# Altium PCB TL203蓝牙主板20529.PcbDoc (part 1 of 3)
Units mil, origin at the board's own origin, x right, y up, seen from the top; angles counter-clockwise.
Board outline 2775 x 2250 mil, 2 copper layers (Top Layer, Bottom Layer); 102 components, 86 nets, 328 pads, 438 vias.
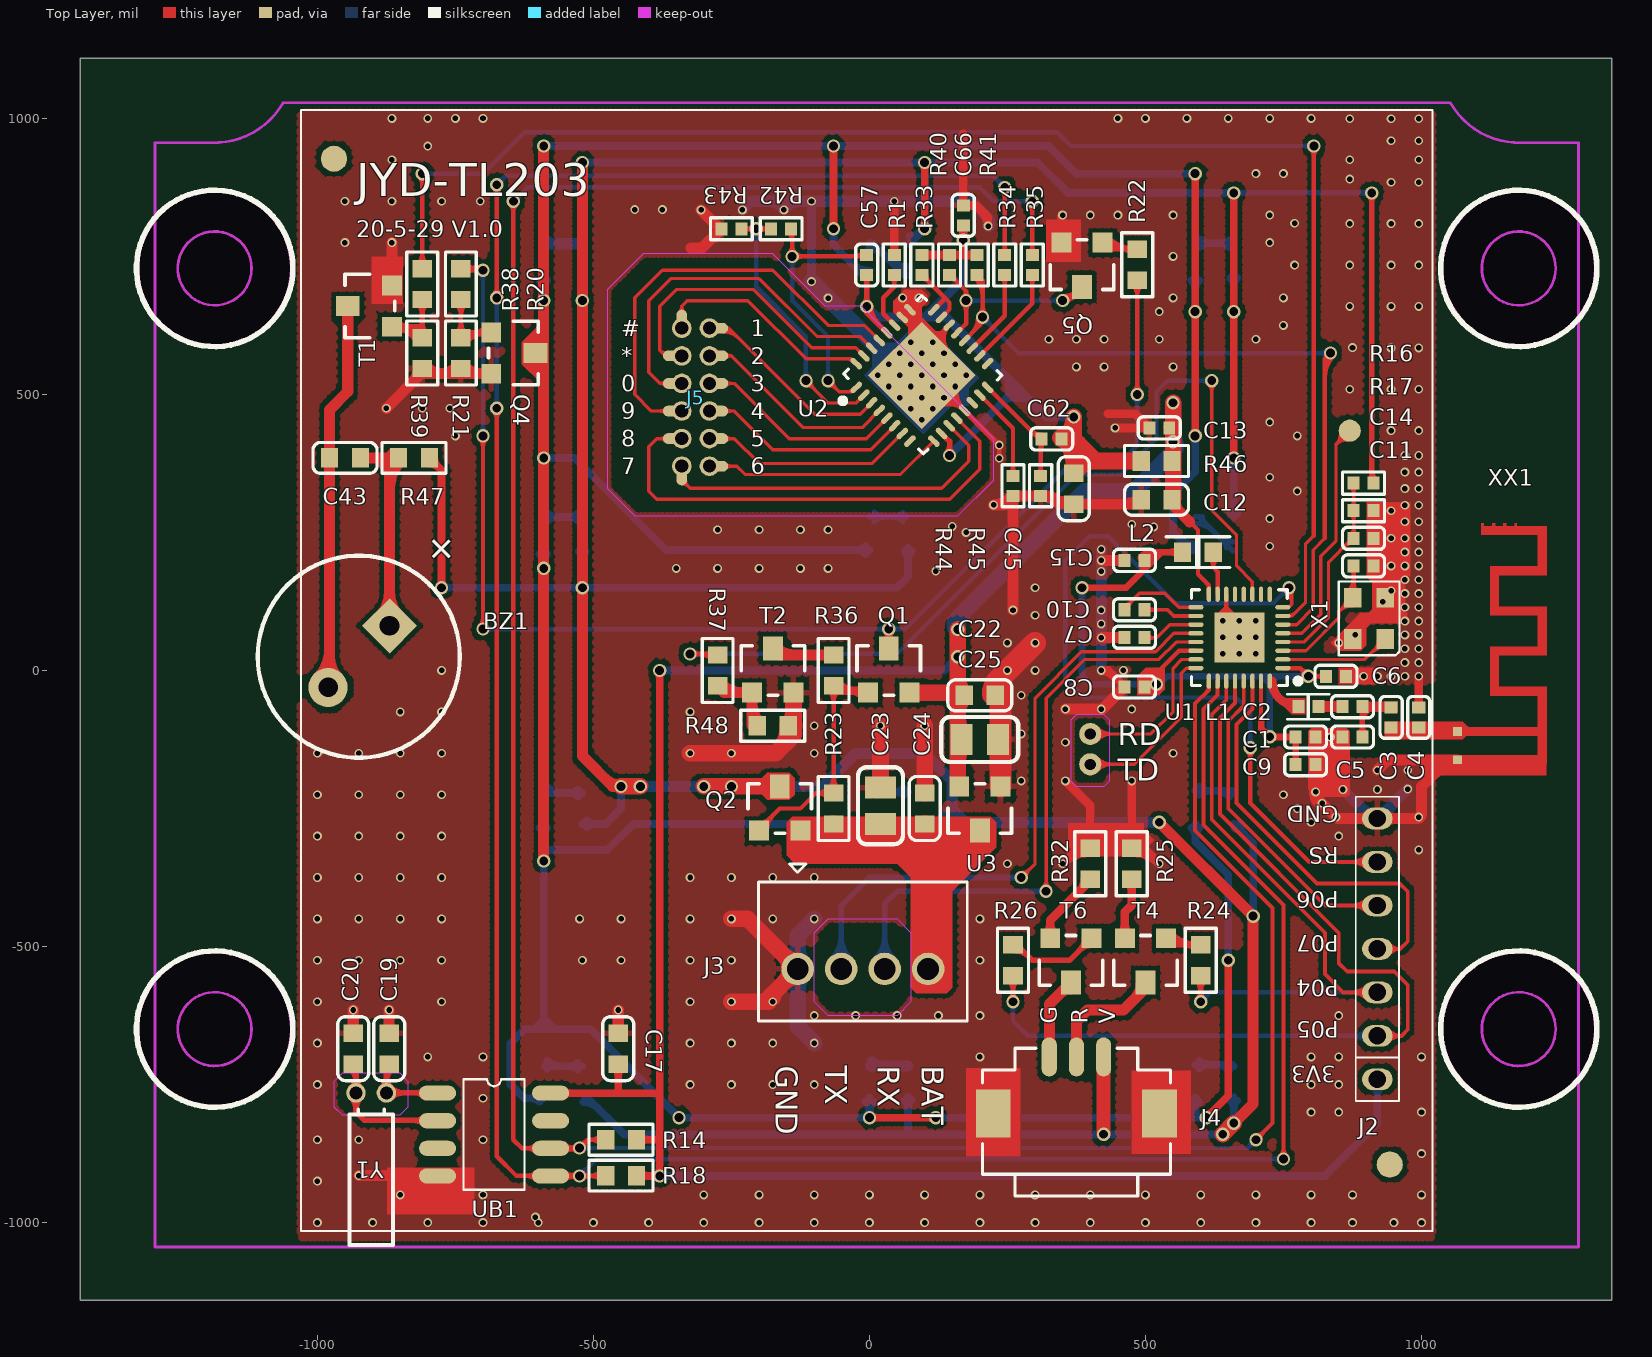
[diagram p0: Top Layer view]
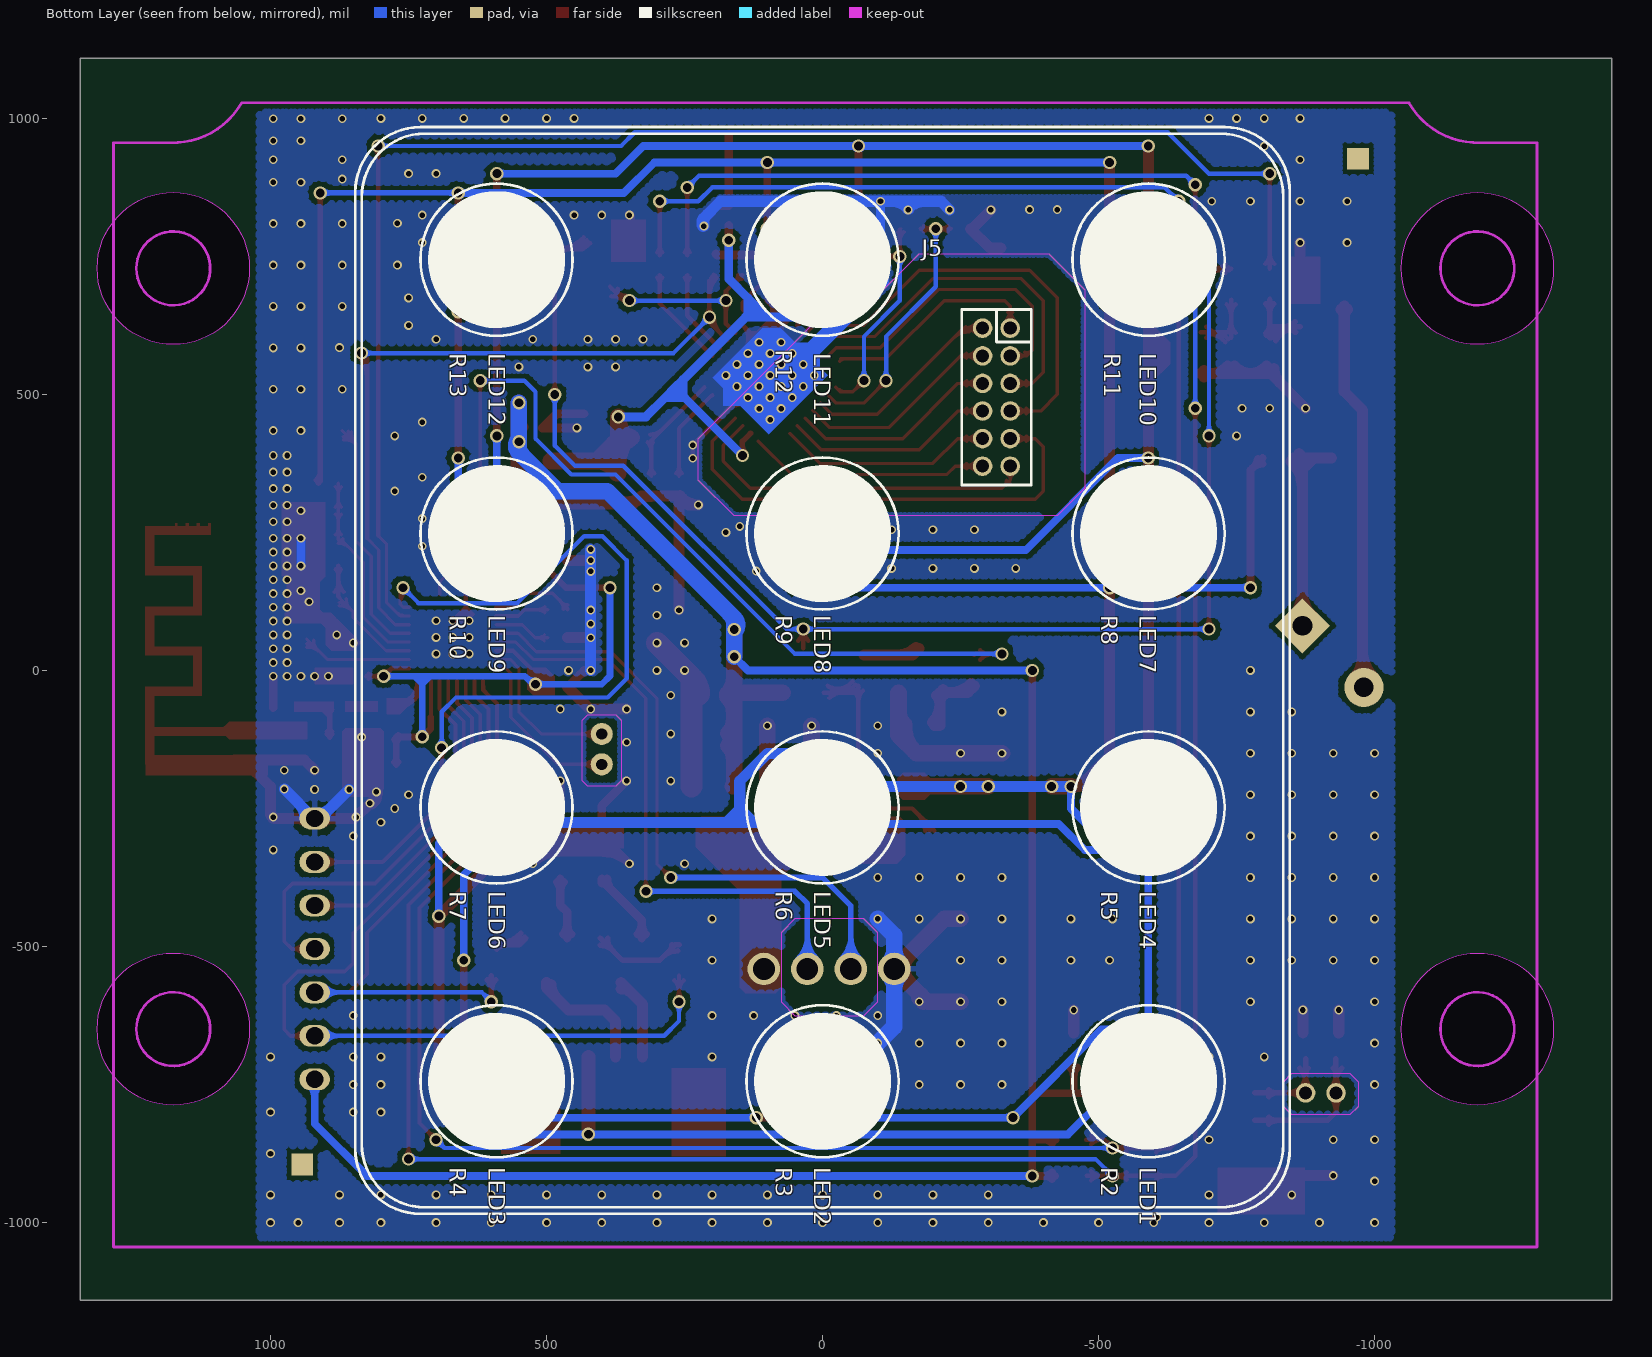
[diagram p1: Bottom Layer view, seen from below]
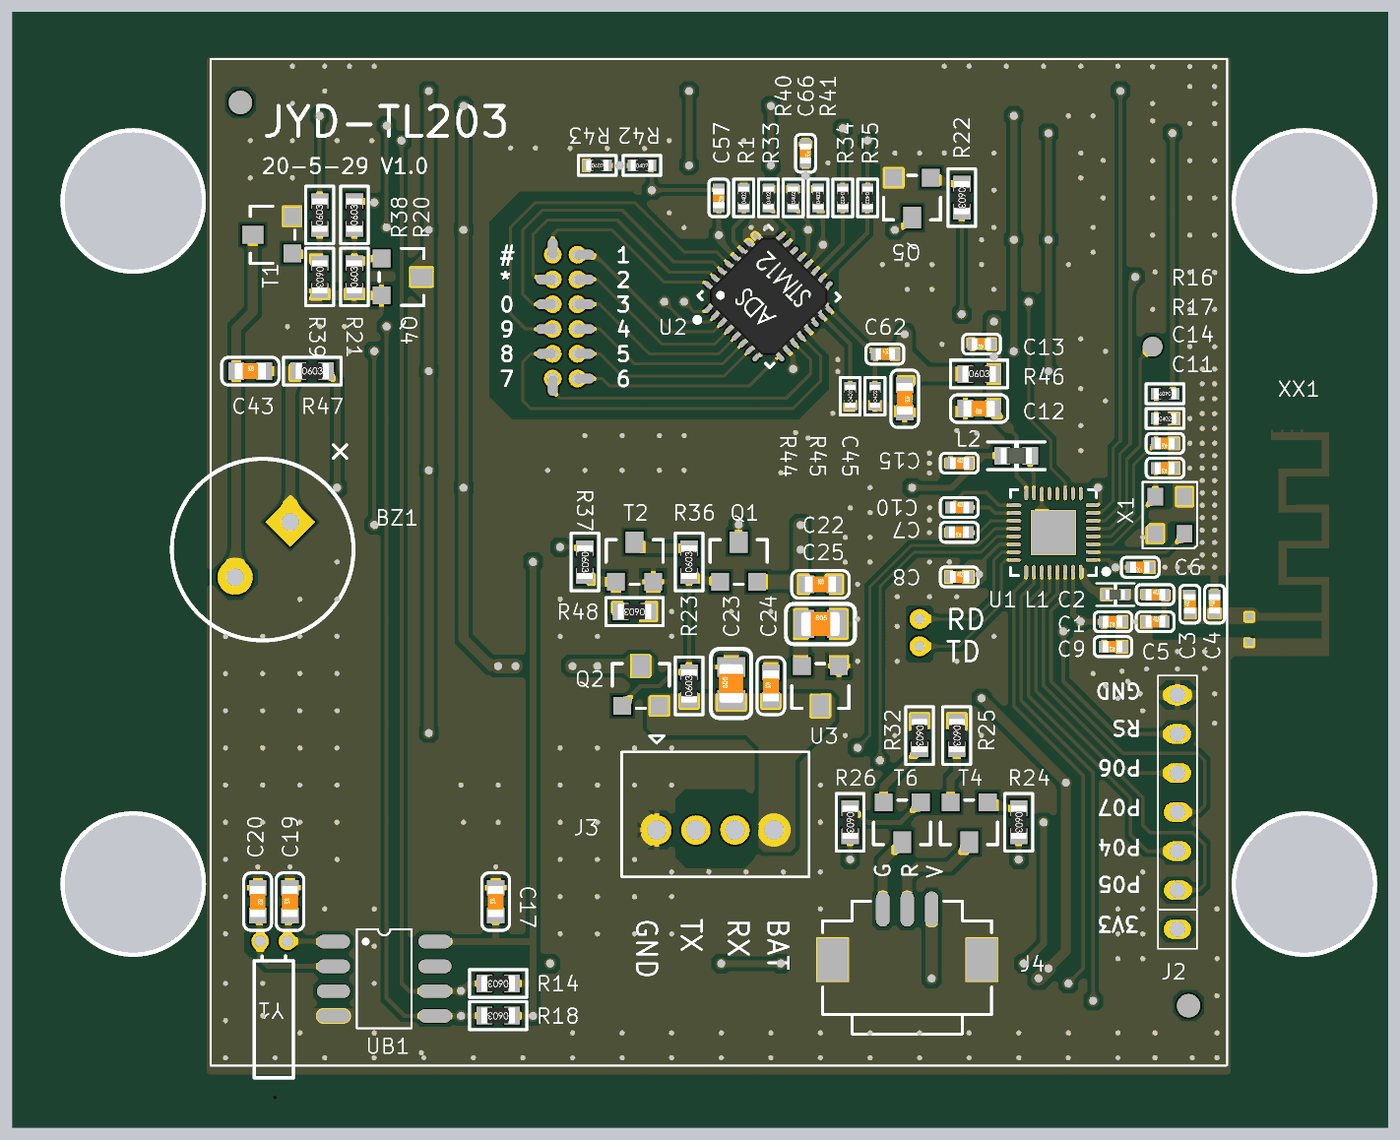
[diagram p4: 3D render of the assembled board from above, using the file's embedded part models]
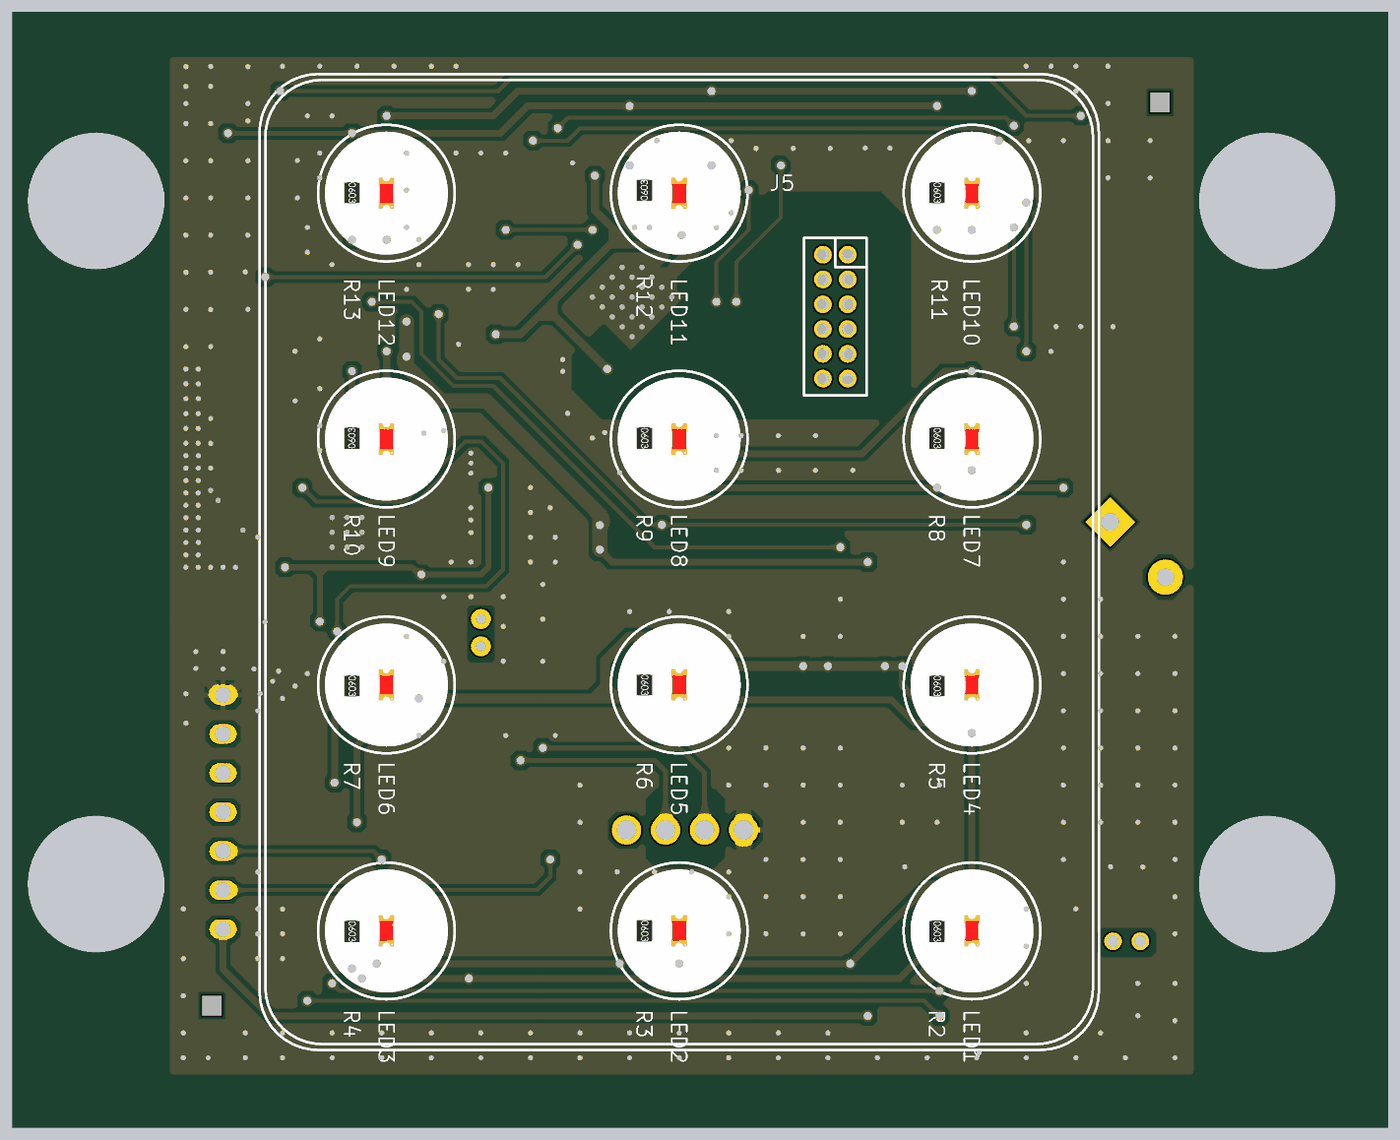
[diagram p5: 3D render of the assembled board from below, using the file's embedded part models]

## Layer stack, top to bottom
Top Layer: signal copper 1.4
Dielectric: dielectric 12.6, FR-4, Dk 4.8
Bottom Layer: signal copper 1.4

## Board outline
-1429.96,1109.41 1345.04,1109.41 1345.04,-1140.59 -1429.96,-1140.59 -1429.96,1109.41
cut-out: -1186.06,866.14 ccw(c-1186.06,728.35) -1323.86,728.35 ccw(c-1186.06,728.35) -1186.06,590.55 ccw(c-1186.06,728.35) -1048.27,728.35 ccw(c-1186.06,728.35)
cut-out: 1176.14,866.14 ccw(c1176.14,728.35) 1038.35,728.35 ccw(c1176.14,728.35) 1176.14,590.55 ccw(c1176.14,728.35) 1313.94,728.35 ccw(c1176.14,728.35)
cut-out: 1176.14,-511.81 ccw(c1176.14,-649.61) 1038.35,-649.61 ccw(c1176.14,-649.61) 1176.14,-787.4 ccw(c1176.14,-649.61) 1313.94,-649.61 ccw(c1176.14,-649.61)
cut-out: -1186.06,-511.81 ccw(c-1186.06,-649.61) -1323.86,-649.61 ccw(c-1186.06,-649.61) -1186.06,-787.4 ccw(c-1186.06,-649.61) -1048.27,-649.61 ccw(c-1186.06,-649.61)

## Design rules (kind name [scope] priority, off if disabled: settings)
Clearance Clearance_1 [(IsWire)or(IsThruPin)or(IsFill)or(InPolygon)or(IsKeepOut) vs (IsWire)or(IsThruPin)or(IsFill)or(InPolygon)or(IsKeepOut)] p1 off: gap=11
Clearance [All] p2: gap=7.87
ComponentClearance [All] p1: gap=0 collisioncheckmode=3 verticalgap=0 showdistances=FALSE
HoleSize [All] p1: absolutevalues=TRUE maxlimit=393.7 minlimit=1 maxpercent=80.000 minpercent=20.000
HoleToHoleClearance [All] p1: gap=0 allowstackedmicrovias=TRUE
MinimumSolderMaskSliver [All] p1: minsoldermaskwidth=0
PolygonConnect PolygonConnect_1 [IsVia] p1: connectstyle=Direct reliefconductorwidth=10 reliefentries=4 polygonreliefangle="90 Angle" airgapwidth=10
PolygonConnect [All] p2: connectstyle=Relief reliefconductorwidth=10 reliefentries=4 polygonreliefangle="90 Angle" airgapwidth=10
RoutingVias [All] p1: holewidth=28 width=50 viastyle="Through Hole" minholewidth=6 minwidth=8 maxholewidth=27.99 maxwidth=27.99
SilkToSilkClearance [All] p1: silktosilkclearance=0
SilkToSolderMaskClearance SilkscreenOverComponentPads [IsPad] p1: minsilkscreentomaskgap=0 clearancetoexposedcopper=TRUE
SolderMaskExpansion [All] p1: expansion=4
Width [All] p1: maxlimit=80 minlimit=3 preferedwidth=10
22 further rules are at their usual default settings.

## Components (designator, comment, footprint, x,y, rotation, side; value= is the part's Value field where it differs from the comment)
BZ1 "BUZZER" BUZZER_D93_L40 -925,25 r225 top
C1 "1uF/6.3V" LC-0402_C 790.04,-120.59 r180 top
C2 "1.0pF" LC-0402_C 875.04,-65.59 r0 top
C3 "0R" LC-0402_C 945,-85 r90 top
C4 "NC" LC-0402_C 995,-85 r90 top
C5 "NC" LC-0402_C 875.04,-120.59 r0 top
C6 "0.1uF" LC-0402_C 845.04,-10.59 r180 top
C7 "0.1uF" LC-0402_C 480,60 r180 top
C8 "1uF" LC-0402_C 480,-30 r0 top
C9 "0.1uF" LC-0402_C 790.04,-170.59 r180 top
C10 "0.1uF" LC-0402_C 480,110 r0 top
C11 "2.7pF" LC-0402_C 895.04,189.41 r180 top
C12 "10uF/6.3V" LC-0603_C 520.04,309.41 r180 top
C13 "0.1uF" LC-0402_C 525.04,439.41 r180 top
C14 "1nF" LC-0402_C 895.04,239.41 r180 top
C15 "10uF" LC-0402_C 480.04,199.41 r0 top
C17 "1uF/6.3V" LC-0603_C -455,-685 r90 top
C19 "22pF" LC-0603_C -870,-685 r90 top
C20 "22pF" LC-0603_C -935,-685 r270 top
C22 "100nF" LC-0603_C 200,-45 r0 top
C23 "22uF/10V" LC-0805_C 20,-245 r90 top
C24 "100nF" LC-0603_C 100,-250 r90 top
C25 "10uF/10V" LC-0805_C 200,-125 r0 top
C43 "10uF/10V" LC-0603_C -950,385 r0 top
C45 "1uF" LC-0603_C 370.04,329.41 r270 top
C57 "820P 1%" LC-0402_C -4.96,734.41 r270 top
C62 "0.1uF" LC-0402_C 330.04,419.41 r0 top
C66 "0.1uF" LC-0402_C 170.04,824.41 r270 top
J2 "7P" 7P-2.0MM 920.04,-740.59 r90 top
J3 "后板串口" 4P-2.0XX -129.96,-540.59 r0 top
J4 "S3B-PH-KL" 3P-1.25mm-SMT 375,-700 r0 top
J5 "Header 12H" 6P*2*1.27MM_1 -314.96,495 r270 bottom
L1 "2nH" LC-0402_L 795.04,-65.59 r180 top
L2 "4.7uH" LC-0603_L 595.04,214.41 r0 top
LED1 "LED" 0603LED -590.55,-744.09 r270 bottom
LED2 "LED" 0603LED 0,-744.09 r270 bottom
LED3 "LED" 0603LED 590.55,-744.09 r270 bottom
LED4 "LED" 0603LED -590.55,-248.03 r270 bottom
LED5 "LED" 0603LED 0,-248.03 r270 bottom
LED6 "LED" 0603LED 590.55,-248.03 r270 bottom
LED7 "LED" 0603LED -590.55,248.03 r270 bottom
LED8 "LED" 0603LED 0,248.03 r270 bottom
LED9 "LED" 0603LED 590.55,248.03 r270 bottom
LED10 "LED" 0603LED -590.55,744.09 r270 bottom
LED11 "LED" 0603LED 0,744.09 r270 bottom
LED12 "LED" 0603LED 590.55,744.09 r270 bottom
Q1 "SI2301" "SOT-23 - GDS" 35,0 r0 top
Q2 "SI2301" "SOT-23 - GDS" -162.4,-250 r0 top
Q4 "SS8050" SOT-23-3L -645,575 r270 top
Q5 "PMBT3904" SOT-23-3L 385,735 r180 top
R1 "2M1%" LC-0402_R 45.04,734.41 r90 top
R2 "100R" LC-0603_R -520,-745 r270 bottom
R3 "100R" LC-0603_R 70,-744.09 r270 bottom
R4 "100R" LC-0603_R 660,-745 r270 bottom
R5 "100R" LC-0603_R -520,-250 r270 bottom
R6 "100R" LC-0603_R 70,-248.03 r270 bottom
R7 "100R" LC-0603_R 660,-250 r270 bottom
R8 "100R" LC-0603_R -520,250 r270 bottom
R9 "100R" LC-0603_R 70,250 r270 bottom
R10 "100R" LC-0603_R 660,250 r90 bottom
R11 "100R" LC-0603_R -520,745 r270 bottom
R12 "100R" LC-0603_R 70,750 r90 bottom
R13 "100R" LC-0603_R 660,745 r270 bottom
R14 "10K" LC-0603_R -450,-850 r180 top
R16 "510K%1" LC-0402_R 895.04,339.41 r180 top
R17 "100K%1" LC-0402_R 895.04,289.41 r0 top
R18 "10K" LC-0603_R -450,-915 r180 top
R20 "1K" LC-0603_R -740,700 r90 top
R21 "10K" LC-0603_R -740,575 r90 top
R22 "10K" LC-0603_R 485,735 r270 top
R23 "100K" LC-0603_R -65,-250 r90 top
R24 "10K" LC-0603_R 600,-525 r270 top
R25 "1K" LC-0603_R 475,-350 r270 top
R26 "10K" LC-0603_R 260,-525 r270 top
R32 "1K" LC-0603_R 400,-350 r270 top
R33 "10K" LC-0402_R 95.04,734.41 r90 top
R34 "10R" LC-0402_R 245.04,734.41 r270 top
R35 "10R" LC-0402_R 295.04,734.41 r270 top
R36 "1K" LC-0603_R -65,0 r90 top
R37 "4.7K" LC-0603_R -275,0 r270 top
R38 "1K" LC-0603_R -810,700 r90 top
R39 "10K" LC-0603_R -810,575 r270 top
R40 "10K" LC-0402_R 145.04,734.41 r90 top
R41 "10K" LC-0402_R 195.04,734.41 r90 top
R42 "510K1%" LC-0402_R -160,800 r0 top
R43 "2M1%" LC-0402_R -250,800 r0 top
R44 "36K 1%" LC-0402_R 260.04,334.41 r90 top
R45 "330K" LC-0402_R 310.04,334.41 r90 top
R46 "0R-空" LC-0603_R 520.04,379.41 r0 top
R47 "10R" LC-0603_R -825,385 r0 top
R48 "100K" LC-0603_R -175,-100 r180 top
T1 "SS8050" SOT-23-3L -905,660 r90 top
T2 "PMBT3904" SOT-23-3L -175,0 r0 top
T4 "MBT3904" "SOT-23 - BCE" 500,-525 r180 top
T6 "MBT3904" "SOT-23 - BCE" 365,-525 r180 top
U1 "BK3431Q" QFN32_4*4*0.4 670.04,59.41 r180 top
U2 "TSM12M" ADS_TMS12 95.04,534.41 r45 top
U3 "HT7533" SOT-23-3L 200,-250 r180 top
UB1 "PCF8563" SOP8 -679.96,-840.59 r0 top
X1 "16MHZ" XTAL3225 905.04,94.41 r90 top
XX1 "TIANX" BT_NAMI_1 1065.04,-110.59 r270 top
Y1 "32.768KHZ" 晶振-9 -875,-765 r180 top

## Footprints (in the part's own frame and the unit in brackets; to place one, negate y for a bottom-side part, rotate by r counter-clockwise, add the part's x,y. Pads: shape width x height; smd on the part's side, far side on the other; paste and mask are expansions set on the pad)
3P-1.25mm-SMT [mm]
  oval 0.7x1.8 smd mask+0.05: 1(-1.25,0) 2(0,0) 3(1.25,0)
  rect 1.6x2.2 smd mask+0.05: 4(-3.825,-2.6) 5(3.825,-2.6)
  silkscreen extent -4.33,-6.4 4.33,0.4
4P-2.0XX [mm]
  round 1.5 hole 1: 1(0,0) 2(2,0) 3(4,0) 4(6,0)
  silkscreen extent -1.8,-2.4 7.8,4.83
6P*2*1.27MM_1 [mm]
  oval 1x0.5 smd far side: 1(-3.527,0.635) 11(3.556,0.635)
  round 0.9 hole 0.6 paste+1: 1(-3.175,0.635)
  oval 0.5x1 smd far side: 2(-3.175,-1) 3(-1.905,1) 4(-1.905,-1) 5(-0.635,1) 6(-0.635,-1) 7(0.635,1) 8(0.635,-1) 9(1.905,1) 10(1.905,-1) 12(3.175,-1)
  round 0.9 hole 0.6 paste+0: 2(-3.175,-0.635) 3(-1.905,0.635) 4(-1.905,-0.635) 5(-0.635,0.635) 6(-0.635,-0.635) 7(0.635,0.635) 8(0.635,-0.635) 9(1.905,0.635) 10(1.905,-0.635) 11(3.175,0.635) 12(3.175,-0.635)
  silkscreen extent -4.04,-1.6 4.04,1.6
7P-2.0MM [mm]
  oval 1x1.4 hole 0.8 mask+0.05: 1(0,0) 2(2,0) 3(4,0) 4(6,0) 5(8,0) 6(10,0) 7(12,0)
  silkscreen extent -1,-1 13,1
0603LED [mil]
  rect 34x34 smd: 1(-30,0) 2(30,0)
  silkscreen extent -60,-30 72,30, body extent -31,-16 31,16, height 24
ADS_TMS12 [mm]
  oval 0.65x0.25 smd: 1(-2.525,1.75) 2(-2.525,1.25) 3(-2.525,0.75) 4(-2.525,0.25) 5(-2.525,-0.25) 6(-2.525,-0.75) 7(-2.525,-1.25) 8(-2.525,-1.75) 17(2.525,-1.75) 18(2.525,-1.25) 19(2.525,-0.75) 20(2.525,-0.25) 21(2.525,0.25) 22(2.525,0.75) 23(2.525,1.25) 24(2.525,1.75)
  oval 0.25x0.65 smd: 9(-1.75,-2.525) 10(-1.25,-2.525) 11(-0.75,-2.525) 12(-0.25,-2.525) 13(0.25,-2.525) 14(0.75,-2.525) 15(1.25,-2.525) 16(1.75,-2.525) 25(1.75,2.525) 26(1.25,2.525) 27(0.75,2.525) 28(0.25,2.525) 29(-0.25,2.525) 30(-0.75,2.525) 31(-1.25,2.525) 32(-1.75,2.525)
  rect 3.5x3.5 smd: 33(0,0)
  silkscreen extent -3.52,-2.6 2.6,2.6, body extent -2.46,-2.49 2.54,2.51, height 0.9
BT_NAMI_1 [mm]
  rect 0.4x0.4 smd: 1(0,0) 2(1.3,0)
  Top Layer region: -7.2,4.1 -9.45,4.1 -9.45,2.74 -9.58,2.74 -9.58,2.63 -9.45,2.63 -9.45,2.24 -9.58,2.24 -9.58,2.12 -9.45,2.12 -9.45,1.73 -9.58,1.73 -9.58,1.61 -9.45,1.61 -9.45,1.22 -9.58,1.22 -9.58,1.1 -9.05,1.1 -9.05,3.7 -7.6,3.7 -7.6,1.5 -5.35,1.5 -5.35,3.7 -3.9,3.7 -3.9,1.5 -1.65,1.5 -1.65,3.7 -0.2,3.7 -0.2,0 0.2,0 0.2,3.7 1.1,3.7 1.1,0 1.5,0 1.5,4.1 -2.05,4.1 -2.05,1.91 -3.5,1.91 -3.5,4.1 -5.75,4.1 -5.74,1.9 -7.2,1.9
BUZZER_D93_L40 [mm]
  rect 1.8x1.8 hole 0.9: 1(-2,0)
  round 1.8 hole 0.9: 2(2,0)
  silkscreen extent -4.65,-4.65 4.65,4.65
LC-0402_C [mm]
  rect 0.55x0.6 smd mask+0.051: 1(-0.457,0) 2(0.457,0)
  silkscreen extent -0.97,-0.51 0.97,0.51, body extent -0.48,-0.3 0.52,0.3, height 0.2
LC-0402_L [mm]
  rect 0.55x0.6 smd mask+0.051: 1(-0.457,0) 2(0.457,0)
  silkscreen extent -0.98,-0.58 0.97,0.58, body extent -0.51,-0.26 0.54,0.26, height 0.36
LC-0402_R [mm]
  rect 0.55x0.6 smd mask+0.051: 1(-0.457,0) 2(0.457,0)
  silkscreen extent -0.97,-0.51 0.97,0.51, body extent -0.57,-0.27 0.58,0.28, height 0.41
LC-0603_C [mm]
  rect 0.8x0.9 smd: 1(-0.711,0) 2(0.711,0)
  silkscreen extent -1.47,-0.71 1.47,0.71, body extent -0.8,-0.4 0.8,0.4, height 0.3
LC-0603_L [mm]
  rect 0.8x0.9 smd: 1(-0.711,0) 2(0.711,0)
  silkscreen extent -1.47,-0.71 1.47,0.71, body extent -0.82,-0.41 0.83,0.41, height 0.46
LC-0603_R [mm]
  rect 0.8x0.9 smd: 1(-0.711,0) 2(0.711,0)
  silkscreen extent -1.47,-0.71 1.47,0.71, body extent -0.85,-0.4 0.85,0.4, height 0.56
LC-0805_C [mil]
  rect 40x56 smd: 1(-33,0) 2(33,0)
  silkscreen extent -70,-41 70,41, body extent -39,-25 39,25, height 30
QFN32_4*4*0.4 [mm]
  rect 2.3x2.3 smd paste-0.025 mask+0.051: 0(0,0)
  oval 0.7x0.2 smd paste-0.025 mask+0.051: 1(-2,1.4) 2(-2,1) 3(-2,0.6) 4(-2,0.2) 5(-2,-0.2) 6(-2,-0.6) 7(-2,-1) 8(-2,-1.4) 17(2,-1.4) 18(2,-1) 19(2,-0.6) 20(2,-0.2) 21(2,0.2) 22(2,0.6) 23(2,1) 24(2,1.4)
  oval 0.2x0.7 smd paste-0.025 mask+0.051: 9(-1.4,-2) 10(-1,-2) 11(-0.6,-2) 12(-0.2,-2) 13(0.2,-2) 14(0.6,-2) 15(1,-2) 16(1.4,-2) 25(1.4,2) 26(1,2) 27(0.6,2) 28(0.2,2) 29(-0.2,2) 30(-0.6,2) 31(-1,2) 32(-1.4,2)
  silkscreen extent -2.82,-2.2 2.2,2.2
SOP8 [mm]
  oval 1.7x0.7 smd mask+0.05: 1(-2.6,1.905) 2(-2.6,0.635) 3(-2.6,-0.635) 4(-2.6,-1.905) 5(2.6,-1.905) 6(2.6,-0.635) 7(2.6,0.635) 8(2.6,1.905)
  round 0.4 on Top Overlay mask+0.05: ""(-0.949,1.905)
  silkscreen extent -1.4,-2.54 1.4,2.54
"SOT-23 - BCE" [mil]
  rect 36x36 smd: B(-37.4,-40) E(37.4,-40)
  rect 36x43.31 smd: C(0,40)
  silkscreen extent -57,-45 58,45
"SOT-23 - GDS" [mil]
  rect 36x43.31 smd: D(0,40)
  rect 36x36 smd: G(-37.4,-40) S(37.4,-40)
  silkscreen extent -57,-45 58,45
SOT-23-3L [mil]
  rect 36x36 smd: 1(-37.4,-40) 2(37.4,-40)
  rect 36x43.31 smd: 3(0,40)
  silkscreen extent -57,-45 58,45
XTAL3225 [mm]
  rect 0.9x0.8 smd: 1(-0.95,-0.75) 2(0.95,-0.75) 3(0.95,0.75) 4(-0.95,0.75)
  silkscreen extent -1.7,-1.4 1.7,1.4
晶振-9 [mm]
  round 0.9 hole 0.6: 1(0,0) 2(1.4,0)
  rect 0x0 smd: 3(0.635,8)
  silkscreen extent -0.3,0.76 1.7,7

## Part data
BZ1: "Buzzer"
C1 C2 C3 C4 C5 C6 C7 C8 C9 C10 C11 C12 C13 C15: library part Cap, "Capacitor"
C14 C22 C24: library part CAP-NP, "Capacitor, Ceramic"
C17 C19 C20: library part C
C23 C25: library part CAP-P, "Capacitor, tolerance ±20%"
C43: library part C_0_Dup1
C45: library part C-C?, "Electrolytic Capacitor"
C57 C62 C66: library part CAP, "Capacitor"
J3: library part "Header 4H", "Header, 4-Pin, Right Angle"
J4: library part "Header 3", "Header, 3-Pin"
J5: "Header, 12-Pin, Right Angle"
L1 L2: "Power Inductor, 4.7uH, 0.7A, 260mR DCR"
Q1 Q2: library part PWRMOSFET_EP_DGS_0
Q4 Q5 T1 T2: library part NPN_BJT, "Bipolar Junction Transistor"
R1 R22 R33 R40 R41 R42 R43 R44 R45: library part RES2
R2 R3 R4 R5 R6 R7 R8 R9 R10 R11 R12 R13 R20 R21 R23 R36 R37 R47 R48: library part R
R14 R18: library part RES_0603A, "Resistor"
R16 R17: library part Res2, "Resistor"
R24 R25 R26 R32: library part RES
R34 R35 R38 R39: library part R_Dup1
R46: library part POWER-R
T4 T6: library part 2N3906, "PNP General Purpose Amplifier"
U3: library part XC6206P302M
UB1: library part IC8
Y1: library part 晶振

## Free pads (board coordinates)
  round 39.37 hole 133.86: 1(-1186.06,-649.61) 2(-1186.06,728.35) 3(1176.14,-649.61) 4(1176.14,728.35)
  round 40 smd: 1(870.04,434.41)
  round 47.24 smd: MARK1(-970,927) MARK2(942.51,-895)
  rect 39.37x39.37 smd far side: MARK3(-970,927) MARK4(942.51,-895)
  round 40 hole 20: RD(400,-115) TD(400,-170)

## Via types
v1: diameter 16, hole 10, Top Layer to Bottom Layer, tented both sides, 357 vias
v2: diameter 24, hole 16, Top Layer to Bottom Layer, tented both sides, 81 vias

## Nets (pads, with @x,y where several pads share a name; then routed paths per layer and width w, separated by ;. In a path a pad name is that pad's centre, name@x,y a point inside that pad or via, vN(x,y) a via of type N, cw(c..) or ccw(c..) an arc to the next point about the centre after c; other vN are vias at no path point)
BAT_ADC: C14.2 R16.2 R17.1 U1.4 | length 514.7
  Top Layer w6: U1.4@748.78,51.54 786.91,51.54 831.62,96.24 831.62,195.99 872.04,236.41 877.04,236.41 C14.2@877.04,239.41 R17.1@877.04,289.41 R16.2@877.04,339.41 ; 858.58,222.95 cw(c877.04,204.5) C14.2@877.04,230.6 ; 865.79,230.16 ccw(c857.52,238.43) C14.2@869.21,238.43 ; C14.2@871.51,245.93 ccw(c858.14,259.29) 877.04,259.29 ccw(c895.93,259.29) C14.2@882.57,245.93 ; R17.1@871.51,282.89 cw(c858.14,269.53) 877.04,269.53 cw(c895.93,269.53) R17.1@882.57,282.89 ; R17.1@871.51,295.93 ccw(c858.14,309.29) 877.04,309.29 ccw(c895.93,309.29) R17.1@882.57,295.93 ; R16.2@871.51,332.89 cw(c858.14,319.53) 877.04,319.53 cw(c895.93,319.53) R16.2@882.57,332.89
BEEP: R38.2 U1.7 | length 2893.6
  Top Layer w6: U1.7@748.78,98.78 765.54,98.78 790,123.24 790,229.37 805.04,244.41 ; U1.7@758.62,99.72 ccw(c758.62,118.67) 772.02,105.27
  Top Layer w8: R38.2@-818.31,736.31 ccw(c-838.36,756.36) -810,756.36 ccw(c-781.64,756.36) R38.2@-801.69,736.31 ; v2@-815.66,894.34 cw(c-829.31,880.69) -810,880.69 cw(c-790.69,880.69) v2@-804.34,894.34 ; R38.2@-810,728 v2(-810,900) ; v2@799.34,944.34 cw(c785.69,930.69) 805,930.69 cw(c824.31,930.69) v2@810.66,944.34 ; 805.04,244.41 805,244.45 v2(805,950)
  Bottom Layer w8: v2(-810,900) -700,900 -625,975 340,975 365,950 v2(805,950) ; v2@-804.34,894.34 cw(c-790.69,880.69) -790.69,900 cw(c-790.69,919.31) v2@-804.34,905.66 ; v2@799.34,944.34 ccw(c785.69,930.69) 785.69,950 ccw(c785.69,969.31) v2@799.34,955.66
GND: C1.1 C3.1 C4.1 C4.2 C5.1 C6.1 C7.2 C8.1 C9.1 C11.1 C12.2 C13.2 C14.1 C15.1 C17.2 C19.2 C20.1 C22.2 C23.2 C24.2 C25.2 C45.2 C66.1 J2.7 J3.1 J4.4 J4.5 Q4.2 Q5.2 R1.2 R17.2 R21.1 R25.1 R32.1 R39.2 R43.1 R44.1 R45.1 R48.1 T1.2 T2.2 U1.0 U1.14 U2.13 U2.22 U2.25 U2.26 U2.33 U3.1 UB1.4 X1.2 X1.4 XX1.1 XX1.2 | length 9461.5
  Top Layer w6: X1.4@873.84,67.66 cw(c883.44,62.63) X1.4@880.63,73.1 ; X1.4@875.51,65.72 ccw(c875.51,86.77) X1.4@890.39,71.89 ; X1.4@875.51,71.72 ccw(c875.51,107.25) 900.63,82.13 ; X1.4@875.93,61.57 cw(c872.98,59.54) X1.4@875.51,57.01 905.04,86.54 905.04,102.28 X1.2@934.57,131.81 ccw(c937.09,129.28) X1.2@934.15,127.25 ; X1.4@879.15,64.87 cw(c899.91,54.01) 893.84,76.64 ; X1.4@880.04,69.41 ccw(c880.04,88.42) 893.48,74.98 ; X1.4@888.26,58.98 cw(c914.28,58.98) 895.88,77.38 ; 909.44,106.69 cw(c934.57,81.57) X1.2@934.57,117.09 ; 914.2,111.44 ccw(c895.79,129.84) X1.2@921.82,129.84 ; 916.23,112.18 ccw(c910.17,134.81) X1.2@930.93,123.95 ; 916.6,113.84 cw(c930.04,100.4) X1.2@930.04,119.41 ; X1.2@919.69,116.93 cw(c934.57,102.05) X1.2@934.57,123.09 ; X1.2@929.45,115.72 ccw(c926.64,126.19) X1.2@936.24,121.16
  Top Layer w7.87: U2.26@59.54,639.5 U2.33@95.04,604.01 ; U2.25@73.46,653.42 95.04,631.85 U2.33@95.04,604.01 ; U2.33@92.17,537.28 ccw(c85.23,544.22) 95.04,544.22 ccw(c104.85,544.22) U2.33@97.91,537.28 ; U2.33@92.17,571.54 cw(c85.23,564.6) 95.04,564.6 cw(c104.85,564.6) U2.33@97.91,571.54 ; U2.33@92.17,577.28 ccw(c85.23,584.22) 95.04,584.22 ccw(c104.85,584.22) U2.33@97.91,577.28 ; v1(95.04,534.41) v1(95.04,574.41) U2.33@95.04,576.17 ; U2.33@95.04,591.5 ccw(c95.04,628.5) U2.33@121.21,602.33 ; U2.33@95.04,599.37 ccw(c95.04,655.39) 134.65,615.78 ; U2.33@99.1,574.41 cw(c113.16,574.41) U2.33@103.22,584.35 ; U2.33@105.1,586.23 cw(c115.04,576.29) U2.33@115.04,590.35 ; U2.33@111.37,595.43 cw(c130.56,590.11) 120.75,607.44 ; U2.33@112.15,557.27 ccw(c105.25,564.1) U2.33@113.9,568.52 ; U2.33@112.76,591.05 cw(c100.13,572.46) U2.33@122.2,576.68 ; U2.33@114.09,598.36 ccw(c109.42,617.83) 126.49,607.37 ; U2.33@114.64,598.45 ccw(c113.79,607.2) U2.33@121.4,602.8 ; U2.33@119.06,595.02 cw(c127.23,596.27) U2.33@123.1,603.43 ; U2.33@119.1,594.41 cw(c133.16,594.41) 123.22,604.35 ; U2.33@119.87,556.84 cw(c144.28,578.89) U2.33@121.02,602.15 ; U2.33@125.71,562.12 cw(c150.43,584.45) 126.88,608.01 ; U2.33@130.3,586.56 cw(c117.57,580.05) U2.33@131.17,575.66 ; U2.33@131.56,567.4 cw(c156.59,590.01) 132.74,613.86 ; U2.33@137.4,572.68 cw(c162.74,595.57) U2.22@138.59,619.72 ; U2.33@143.24,577.96 cw(c168.9,601.13) U2.22@144.45,625.58 U2.33@95.04,576.17 ; U1.0@646.42,103.03 U1.14@646.42,138.15 ; U2.33@95.04,576.17 U2.33@95.04,604.01
  Top Layer w8: U2.33@111.53,516.34 ccw(c98.21,523.66) 108.96,534.41 U2.13@172.29,471.08 ; U2.33@115.04,510.41 cw(c115.04,467.15) U2.33@145.63,497.74 ; U2.33@115.04,518.41 cw(c115.04,494.46) U2.33@131.97,511.4 ; U2.33@116.5,526.87 cw(c107.94,518.31) U2.33@118.55,512.48 ; U2.33@118.37,525 cw(c87.78,494.41) U2.33@131.04,494.41 ; U2.33@118.65,491.59 cw(c134.31,463.2) 157.24,486.13 ; U2.33@122.52,484.59 cw(c139.66,453.5) U2.13@164.77,478.6 ; U2.33@122.65,492.57 cw(c125.9,479.33) U2.33@132.97,490.99 ; U2.33@126.38,477.58 cw(c145.01,443.8) U2.13@172.29,471.08 ; U2.33@127.36,506.62 cw(c120.29,487.68) U2.33@138.68,496.07 ; U2.33@132.03,511.34 cw(c115.09,494.41) U2.33@139.04,494.41 ; U2.33@135.04,490.41 cw(c135.04,447.15) U2.13@165.63,477.74 ; U2.33@135.04,498.41 cw(c135.04,474.46) 151.97,491.4 ; U2.33@136.53,490.7 cw(c141.54,478.19) U2.33@146.84,490.58 ; U2.33@138.62,496.18 ccw(c164,508.75) 154.94,481.92 ; U2.33@142.69,523.44 ccw(c176.11,515.75) 151.86,491.51 ; U2.33@150.49,521.65 ccw(c192.72,511.93) 162.08,481.29 ; U2.33@158.28,519.86 ccw(c209.32,508.11) U2.13@172.29,471.08 ; v1@232.21,387.24 ccw(c225.38,394.07) 235.04,394.07 ccw(c244.7,394.07) v1@237.87,387.24 ; v1@232.21,405.5 cw(c225.38,398.67) 235.04,398.67 cw(c244.7,398.67) v1@237.87,405.5 ; v1(235.04,384.41) v1(235.04,408.33)
  Top Layer w10: U2.13@172.29,471.08 v1(235.04,408.33)
  Top Layer w16: R1.2@45.04,752.41 v1(45.04,850) ; 170.04,972.07 C66.1@170.04,842.41 192.59,842.41 215,820 v1(215,805) ccw(c178.79,805) 204.39,830.61 ; Q5.2@340.53,782.07 ccw(c323.46,799.14) 347.6,799.14 ccw(c371.74,799.14) Q5.2@354.67,782.07 ; Q5.2@347.6,775 347.6,822.6 v1(350,825) ; v1(350,-350) 378,-322 R32.1@400,-322 400,-245 v1(355,-200) ; v1@350.61,-349.39 cw(c398.03,-396.81) R32.1@398.03,-329.75 ; 377.92,-322.08 cw(c398.03,-342.19) R32.1@398.03,-313.75 ; R32.1@392.55,-327.48 ccw(c379.33,-340.71) 379.33,-322 ccw(c379.33,-303.29) R32.1@392.55,-316.52 ; R32.1@394.52,-316.52 ccw(c381.29,-303.29) 400,-303.29 ccw(c418.71,-303.29) R32.1@405.48,-316.52 ; 432.43,465 481.45,465 C13.2@507.04,439.41 v1(445.04,439.41) ; 440.49,-8.49 ccw(c420,-28.97) v1(420,0) 432,0 C8.1@462,-30 ; R25.1@469.52,-316.52 ccw(c456.29,-303.29) 475,-303.29 ccw(c493.71,-303.29) R25.1@480.48,-316.52 ; v1(475,-200) R25.1@475,-322 497,-322 v1(525,-350) ; R25.1@476.97,-329.75 cw(c476.97,-396.81) v1@524.39,-349.39 ; R25.1@476.97,-313.75 cw(c476.97,-342.19) 497.08,-322.08 ; R25.1@482.45,-327.48 cw(c495.67,-340.71) 495.67,-322 cw(c495.67,-303.29) R25.1@482.45,-316.52 ; C1.1@813.04,-120.59 C5.1@857.04,-120.59 ; C6.1@863.04,-10.59 v1(895.04,-10.59) ; C11.1@913.04,189.41 v1(945.04,189.41) ; v1(945.04,239.41) v1(945.04,289.41) ; C4.2@995.04,-67 v1(995.04,-10.59)
  Top Layer w19.68: C3.1@946.68,-102.3 ccw(c966.69,-82.3) 966.69,-110.59 ; C3.1@947.04,-110.59 XX1.1@1065.04,-110.59 ; 973.31,-110.59 ccw(c973.31,-82.3) C4.1@993.32,-102.3 ; C4.1@996.68,-102.3 ccw(c1016.69,-82.3) 1016.69,-110.59
  Top Layer w20: C20.1@-935,-657 v1(-935,-615) ; v1(-925,-915) -782.91,-915 UB1.4@-782.32,-915.59 ; v1(-875,475) -812.4,537.6 Q4.2@-685,537.6 ; T1.2@-870.66,703.06 ccw(c-884.31,716.72) -865,716.72 ccw(c-845.69,716.72) T1.2@-859.34,703.06 ; C19.2@-870,-657 v1(-870,-615) ; T1.2@-865,697.4 v1(-865,775) ; -828.12,521.88 ccw(c-853.25,547) R39.2@-817.72,547 ; R39.2@-803.97,551.06 ccw(c-771.46,583.58) -771.46,537.6 ; -778.54,537.6 ccw(c-778.54,583.58) R21.1@-746.03,551.06 ; R21.1@-733.97,551.06 ccw(c-701.46,583.58) Q4.2@-701.46,537.6 ; Q4.2@-690.66,531.94 ccw(c-704.31,518.28) -704.31,537.6 ccw(c-704.31,556.91) Q4.2@-690.66,543.25 ; C17.2@-455,-657 v1(-455,-615) ; -322.92,765 -303,765 R43.1@-268,800 -270.55,800 v1(-304.96,834.41) ; R44.1@258.39,316.9 cw(c225,341.43) v1(225,300) 243.63,300 R44.1@260.04,316.41 ; v1(260.04,109.41) R44.1@260.04,316.41 ; R45.1@311.02,315.58 cw(c311.02,272.51) 341.48,302.97 ; v1(355,-70) v1(420,-70) 422,-70 C8.1@462,-30 ; C45.2@366.38,306.9 cw(c355.1,343.46) 328.04,316.41 ; v1(420.04,59.41) C7.2@462.04,59.41 ; v1(420.04,199.41) C15.1@462.04,199.41 ; 463.6,301.41 ccw(c463.6,335.88) C12.2@487.97,311.51 ; C12.2@492.04,309.41 484.04,301.41 C45.2@370.04,301.41 343.04,301.41 328.04,316.41 ; v1@806.04,-220 ccw(c821.95,-220) 810.7,-231.25 ; v1@808.04,-216.45 ccw(c844.18,-216.45) v1@818.63,-242 ; C1.1@808.04,-120.59 C9.1@808.04,-170.59 808.04,-228.59 ; v1@819.68,-242.56 cw(c822.24,-228.59) 808.04,-228.59 ; J2.7@905.32,-275 ccw(c888.78,-291.53) 888.78,-268.15 ccw(c888.78,-244.77) J2.7@905.32,-261.3 ; v1(920.04,-180.59) 938.86,-161.77 1048.86,-161.77 ; J2.7@934.76,-275 cw(c951.3,-291.53) 951.3,-268.15 cw(c951.29,-244.77) J2.7@934.76,-261.3 ; v1@996.45,-267 ccw(c987.8,-258.35) 1000.04,-258.35 ; XX1.2@1065.04,-161.77 1048.86,-161.77 ; R44.1@260.04,316.41 R45.1@310.04,316.41 328.04,316.41 ; 808.04,-228.59 v1(820.04,-240.59) v1(845.04,-265.59) 847.6,-268.15 992.48,-268.15 v1(995.04,-265.59) 1000.04,-260.59 1000.04,-210.59 1048.86,-161.77
  Top Layer w30: v1(-325,-150) -170,-150 -137.6,-117.6 T2.2@-137.6,-40 ; v1(-250,-600) -189.37,-600 J3.1@-129.96,-540.59 -220.55,-450 v1(-250,-450) ; -187.58,-598.21 cw(c-175,-610.79) v1@-175,-593 ; v1@-182,-600 cw(c-164.21,-600) -176.79,-587.42 ; -165.98,-145.98 ccw(c-209.99,-101.97) R48.1@-147.75,-101.97 ; R48.1@-147.53,-97.5 ccw(c-171.5,-73.53) -137.6,-73.53 ; J3.1@-129.96,-555.12 ccw(c-129.96,-590.19) -154.76,-565.39 ccw(c-179.56,-540.59) -144.49,-540.59 ccw(c-179.56,-540.59) -154.76,-515.79 ccw(c-129.96,-490.99) J3.1@-129.96,-526.06 ; C23.2@20,-212 v1(20,-100) ; C24.2@100,-222 v1(100,-100) ; R32.1@400,-322 R25.1@475,-322
  Top Layer w40: U3.1@237.4,-210 237.4,-12.6 v1(250,0) v1(300,50) ; C22.2@223.75,-43.03 cw(c264.26,-43.03) 235.61,-14.39 ccw(c264.26,-43.03) C22.2@223.75,-43.03
  Bottom Layer w16: v1(-104.96,704.41) v1(-104.96,850) ; 65.04,534.41 v1(95.04,534.41) ; v1(945.04,189.41) v1(945.04,239.41)
  Bottom Layer w20: v1(-229.96,834.41) -214.37,850 v1(-104.96,850) v1(45.04,850) 185,850 215,820 ; -187.77,850 cw(c-187.77,801.6) v1@-153.55,835.82 ; v1@-156.37,835.82 cw(c-122.15,801.6) -122.15,850 ; 207.81,827.19 cw(c185.62,805) v1@217,805 ; v1(215,805) 215,820 ; v1@216.68,803.91 ccw(c205.92,810.92) 215,820 ; v1@420.04,0.04 v1(420.04,59.41) v1(420.04,84.41) v1(420.04,109.41) v1(420.04,179.41) v1(420.04,199.41) v1(420.04,219.41) ; v1(857.75,-215.59) 910.31,-268.15 921.65,-268.15 v1(975.04,-214.76) ; 892.46,-250.3 ccw(c912.17,-230.6) J2.7@912.17,-258.46 ; 896.94,-254.78 cw(c883.58,-268.15) J2.7@902.48,-268.15 ; J2.7@937.6,-268.15 cw(c976.1,-268.15) 948.87,-240.93
  Bottom Layer w30: J3.1@-140.23,-550.86 cw(c-165.03,-575.66) -129.96,-575.66 cw(c-94.89,-575.66) J3.1@-119.69,-550.86 ; J3.1@-140.23,-530.32 ccw(c-165.03,-505.52) -129.96,-505.52 ccw(c-94.89,-505.52) J3.1@-119.69,-530.32 ; v1(-104.96,704.41) v1(-75,674.45) 65.04,534.41 ; v1(-100,-675) -129.96,-645.04 J3.1@-129.96,-540.59 -129.96,-479.96 v1(-100,-450) ; 15.78,583.67 ccw(c55.04,622.94) v1@55.04,567.41 ; 35.78,563.67 ccw(c75.04,602.94) v1@75.04,547.41 ; v1@48.04,574.41 ccw(c103.57,574.41) 64.3,535.15
  other v1: -1000,-1000 -900,-1000 -800,-1000 -700,-1000 -600,-1000 -500,-1000 -400,-1000 -300,-1000 -200,-1000 -100,-1000 0,-1000 100,-1000 200,-1000 300,-1000 400,-1000 500,-1000 600,-1000 700,-1000 800,-1000 875,-1000 950,-1000 1000,-1000 -605,-990 -850,-950 -700,-950 -300,-950 -200,-950 -100,-950 0,-950 100,-950 200,-950 300,-950 400,-950 500,-950 600,-950 700,-950 800,-950 875,-950 1000,-950 -1000,-925 1000,-875 -1000,-850 -925,-850 -700,-850 800,-800 850,-800 1000,-800 -700,-775 -1000,-750 -325,-750 -250,-750 -175,-750 -100,-750 800,-750 850,-750 -800,-700 -700,-700 200,-700 800,-700 850,-700 1000,-700 -1000,-675 -325,-675 -250,-675 -175,-675 -100,-625 -25,-625 50,-625 125,-625 200,-625 850,-625 -1000,-600 -775,-600 -325,-600 -175,-600 -1000,-525 -925,-525 -850,-525 -775,-525 -520,-525 -450,-525 -325,-525 -250,-525 200,-525 -1000,-450 -925,-450 -850,-450 -775,-450 -525,-450 -450,-450 -325,-450 -175,-450 200,-450 -1000,-375 -925,-375 -850,-375 -775,-375 -325,-375 -250,-375 -175,-375 -100,-375 250,-350 995,-325 -1000,-300 -925,-300 -850,-300 -775,-300 850,-300 800,-275 775,-250 -1000,-225 -925,-225 -850,-225 -775,-225 750,-225 808.04,-220 920.04,-215.59 275,-200 975.04,-180.82 -1000,-150 -925,-150 -850,-150 -775,-150 -250,-150 -100,-150 550,-150 355,-130 835.04,-120.59 275,-115 -100,-100 -850,-75 -775,-75 -325,-75 475,-70 275,-45 920.04,-10.59 945.04,-10.59 970.04,-10.59 -775,0 300,0 460,0 970.04,14.41 995.04,14.41 640,30 670,30 700,30 970.04,39.41 995.04,39.41 250,50 850,50 640,60 670,60 700,60 880.04,64.41 970.04,64.41 995.04,64.41 970.04,89.41 995.04,89.41 640,90 670,90 700,90 300,100 970.04,114.41 995.04,114.41 930.04,124.41 970.04,139.41 995.04,139.41 945.04,144.41 300,150 970.04,164.41 995.04,164.41 120,180 -350,185 -275,185 -200,185 -125,185 -75,185 970.04,189.41 995.04,189.41 970.04,214.41 995.04,214.41 725,225 970.04,239.41 995.04,239.41 175,250 -275,255 -200,255 -125,255 -75,255 515,260 150,260.97 475,265 970.04,269.41 995.04,269.41 725,275 970.04,299.41 995.04,299.41 775,325 970.04,329.41 995.04,329.41 725,350 970.04,359.41 995.04,359.41 970.04,389.41 995.04,389.41 -750,425 775,425 945.04,434.41 995.04,434.41 725,450 95.04,454.41 75.04,474.41 115.04,474.41 -810,475 -760,475 55.04,494.41 95.04,494.41 135.04,494.41 870.04,509.41 945.04,509.41 995.04,509.41 35.04,514.41 75.04,514.41 115.04,514.41 155.04,514.41 15.04,534.41 55.04,534.41 135.04,534.41 175.04,534.41 375,550 425,550 550,550 35.04,554.41 75.04,554.41 115.04,554.41 155.04,554.41 55.04,574.41 135.04,574.41 945.04,584.41 995.04,584.41 875,585 75.04,594.41 115.04,594.41 325,600 375,600 425,600 525,600 700,600 750,625 525,650 870.04,659.41 945.04,659.41 995.04,659.41 60,675 90,675 550,675 750,675 770.04,734.41 870.04,734.41 945.04,734.41 995.04,734.41 550,750 -950,775 725,775 870.04,809.41 945.04,809.41 995.04,809.41 770,810 400,825 450,825 550,825 725,825 -154.96,834.41 -425,835 -375,835 -950,850 -865,850 -775,850 -705,850 945.04,884.41 995.04,884.41 870,890 700,900 750,900 -865,925 870,925 995,925 -800,950 945.04,959.41 995.04,959.41 870.04,999.41 945.04,999.41 995.04,999.41 -865,1000 -800,1000 -750,1000 -700,1000 450,1000 500,1000 575,1000 650,1000 725,1000 800,1000
GREEN_LL: J4.1 T6.C | length 173.3
  Top Layer w20: J4.1@325.79,-700 325.79,-604.21 T6.C@365,-565 ; 345.11,-584.89 cw(c365,-604.79) T6.C@365,-576.65
INT_APT: U1.12
INT_FP: pad.1@870.04,434.41 U1.5 | length 520.9
  Top Layer w6: U1.5@748.78,67.28 783.04,67.28 817.75,101.99 817.75,207.12 845.04,234.41 845.04,409.41 ; pad.1@853.14,432.53 cw(c825.06,429.39) 845.04,409.41 ; pad.1@859.11,433.19 cw(c840.93,431.16) 853.86,418.23 cw(c866.79,405.3) pad.1@868.82,423.48 ; pad.1@868.16,417.51 ccw(c865.02,389.43) 845.04,409.41 ; pad.1@870.04,434.41 845.04,409.41
IRQ_TSM12: R41.1 U1.6 U2.20 | length 1623.1
  Top Layer w6: U1.6@748.78,83.03 773.66,83.03 803.87,113.24 803.87,218.24 825,239.37
  Top Layer w8: U2.20@172.29,597.74 205,630.45 v2(205,640) ; 184.59,610.04 ccw(c154.63,640) v2@197,640 ; R41.1@191.2,711.58 cw(c157.87,678.26) 205,678.26 ; R41.1@195.04,716.41 205,706.45 v2(205,640) ; R41.1@196.85,717.24 cw(c177.19,697.57) 205,697.57 ; 198.25,623.7 ccw(c181.95,640) v2(205,640) ; v2@199.34,645.66 ccw(c185.69,659.31) 205,659.31 ccw(c224.31,659.31) v2@210.66,645.66 ; 825,239.37 825,565 ; 825,531.54 cw(c878.46,531.54) v2@840.66,569.34 ; 825,550.86 cw(c859.14,550.86) v2(835,575) 825,565 ; v2@827.24,573.07 cw(c818.99,571.01) 825,565 ; v2@833.07,567.24 ccw(c831.01,558.99) 825,565
  Bottom Layer w8: v2@205,632 cw(c205,612.69) 218.66,626.34 cw(c232.31,640) v2@213,640 ; v2(205,640) 270,575 v2(835,575) ; v2@829.34,569.34 ccw(c815.69,555.69) 815.69,575 ccw(c815.69,594.31) v2@829.34,580.66
KEY0: J5.5 U2.30 | length 769.8
  Top Layer w6: J5.5@-369.16,515.31 ccw(c-380,505.12) -380,520 ; J5.5@-369.16,524.69 cw(c-380,534.88) -380,520 ; J5.5@-354.33,520 -380,520 ; J5.5@-350.37,509.59 ccw(c-375.49,484.47) -375.49,520 ccw(c-375.49,555.53) J5.5@-350.37,530.41 ; J5.5@-346.12,513.84 ccw(c-361,498.96) -361,520 ccw(c-361,541.04) J5.5@-346.12,526.16 ; U2.30@3.87,583.82 -17.31,605 -95,605 -200,710 -360,710 -400,670 -400,540 -380,520
KEY1: J5.2 U2.3 | length 505.9
  Top Layer w6: J5.2@-283.73,613.91 cw(c-269.25,599.76) -269.25,620 cw(c-269.25,640.23) J5.2@-283.73,626.09 ; J5.2@-279.44,609.71 cw(c-255,585.84) -255,620 ; J5.2@-279.44,630.29 ccw(c-255,654.16) -255,620 ; J5.2@-275.59,620 -255,620 ; J5.2@-265.75,613.16 cw(c-265.75,570.69) -235.72,600.72 ; J5.2@-265.75,619.16 cw(c-265.75,591.17) -245.96,610.96 ; J5.2@-259.55,617.1 cw(c-255,614.98) -255,620 ; J5.2@-259.55,622.9 ccw(c-255,625.02) -255,620 ; U2.3@3.87,485 -16.72,464.41 -99.41,464.41 -255,620
KEY2: J5.4 U2.4 | length 473.1
  Top Layer w6: J5.4@-283.8,563.84 cw(c-268.92,548.96) -268.92,570 cw(c-268.92,591.04) J5.4@-283.8,576.16 ; J5.4@-279.55,559.59 cw(c-254.43,534.47) -254.43,570 cw(c-254.43,605.53) J5.4@-279.55,580.41 ; J5.4@-275.59,570 -250,570 ; J5.4@-260.75,565.33 cw(c-250,555.3) -250,570 ; J5.4@-260.75,574.67 ccw(c-250,584.7) -250,570 ; U2.4@17.79,471.08 -13.29,440 -120,440 -250,570
KEY3: J5.6 U2.5 | length 479
  Top Layer w6: J5.6@-283.8,513.84 cw(c-268.92,498.96) -268.92,520 cw(c-268.92,541.04) J5.6@-283.8,526.16 ; J5.6@-279.55,509.59 cw(c-254.43,484.47) -254.43,520 cw(c-254.43,555.53) J5.6@-279.55,530.41 ; J5.6@-275.59,520 -245,520 -145,420 -5.45,420 U2.5@31.71,457.16 ; J5.6@-260.91,515.16 cw(c-249.23,503.48) -249.23,520 cw(c-249.23,536.52) J5.6@-260.91,524.84
KEY4: J5.8 U2.6 | length 483
  Top Layer w6: J5.8@-283.8,463.84 cw(c-268.92,448.96) -268.92,470 cw(c-268.92,491.04) J5.8@-283.8,476.16 ; J5.8@-279.55,459.59 cw(c-254.43,434.47) -254.43,470 cw(c-254.43,505.53) J5.8@-279.55,480.41 ; J5.8@-275.59,470 -245,470 -175,400 2.39,400 U2.6@45.63,443.24 ; J5.8@-260.91,465.16 cw(c-249.23,453.48) -249.23,470 cw(c-249.23,486.52) J5.8@-260.91,474.84
KEY5: J5.10 U2.7 | length 491.1
  Top Layer w6: J5.10@-283.8,413.84 cw(c-268.92,398.96) -268.92,420 cw(c-268.92,441.04) J5.10@-283.8,426.16 ; J5.10@-279.55,409.59 cw(c-254.43,384.47) -254.43,420 cw(c-254.43,455.53) J5.10@-279.55,430.41 ; J5.10@-275.59,420 -245,420 -200,375 5.23,375 U2.7@59.54,429.32 ; J5.10@-260.91,415.16 cw(c-249.23,403.48) -249.23,420 cw(c-249.23,436.52) J5.10@-260.91,424.84
KEY6: J5.12 U2.9 | length 538.3
  Top Layer w6: J5.12@-283.8,363.84 cw(c-268.92,348.96) -268.92,370 cw(c-268.92,391.04) J5.12@-283.8,376.16 ; J5.12@-279.55,359.59 cw(c-254.43,334.47) -254.43,370 cw(c-254.43,405.53) J5.12@-279.55,380.41 ; J5.12@-275.59,370 -240,370 -225,355 56.22,355 U2.9@116.61,415.4 ; J5.12@-260.91,365.16 cw(c-249.23,353.48) -249.23,370 cw(c-249.23,386.52) J5.12@-260.91,374.84
KEY7: J5.11 U2.11 | length 690.8
  Top Layer w6: J5.11@-347.13,357.15 cw(c-353.91,345) J5.11@-340,345 ; J5.11@-339.96,338.31 cw(c-339.96,322.27) -328.62,333.62 ; J5.11@-340,355 J5.11@-340,345 ; J5.11@-333.12,345.16 ccw(c-316.12,345.16) -328.14,333.14 ; J5.11@-332.85,357.12 ccw(c-326.16,345) J5.11@-340,345 ; U2.11@144.45,443.24 180.04,407.65 180.04,379.41 130.63,330 -325,330 J5.11@-340,345
KEY8: J5.9 U2.12 | length 985.5
  Top Layer w6: J5.9@-369.01,415.16 ccw(c-380.69,403.48) -380.69,420 ccw(c-380.69,436.52) J5.9@-369.01,424.84 ; J5.9@-354.33,420 -385,420 -400,405 -400,325 -385,310 145.63,310 200.04,364.41 200.04,415.49 U2.12@158.37,457.16 ; J5.9@-350.37,409.59 ccw(c-375.49,384.47) -375.49,420 ccw(c-375.49,455.53) J5.9@-350.37,430.41 ; J5.9@-346.12,413.84 ccw(c-361,398.96) -361,420 ccw(c-361,441.04) J5.9@-346.12,426.16
KEY9: J5.7 U2.29 | length 889.1
  Top Layer w6: J5.7@-369.01,465.16 ccw(c-380.69,453.48) -380.69,470 ccw(c-380.69,486.52) J5.7@-369.01,474.84 ; J5.7@-354.33,470 -395,470 -425,500 -425,675 -375,725 -175,725 -75,625 -9.47,625 U2.29@17.79,597.74 ; J5.7@-350.37,459.59 ccw(c-375.49,434.47) -375.49,470 ccw(c-375.49,505.53) J5.7@-350.37,480.41 ; J5.7@-346.12,463.84 ccw(c-361,448.96) -361,470 ccw(c-361,491.04) J5.7@-346.12,476.16
KEY#: J5.1 U2.32 | length 507.2
  Top Layer w6: J5.1@-350.37,630.41 ccw(c-375.39,655.43) -340,655.43 ; J5.1@-346.12,626.16 ccw(c-360.91,640.95) J5.1@-340,640.95 ; J5.1@-344.77,648.57 ccw(c-356.08,660) -340,660 ; J5.1@-340,633.86 -340,660 ; J5.1@-340,641.14 ccw(c-318.82,641.14) J5.1@-333.8,626.16 ; -340,655.62 ccw(c-304.34,655.62) J5.1@-329.55,630.41 ; J5.1@-335.19,648.6 cw(c-324.1,660) -340,660 ; -41.08,564.41 cw(c-41.08,550.02) U2.32@-30.9,560.19 ; U2.32@-32.4,564.41 -114.41,564.41 -220,670 -330,670 -340,660
KEY*: J5.3 U2.31 | length 624.5
  Top Layer w6: J5.3@-366.17,576.54 cw(c-370.21,589.79) -380,580 ; J5.3@-354.33,570 J5.3@-370,570 ; J5.3@-351.59,560.98 ccw(c-370,546.7) J5.3@-370,570 ; J5.3@-351.59,579.02 cw(c-370,593.3) J5.3@-370,570 ; J5.3@-346.85,564.66 ccw(c-357.75,556.2) -357.75,570 ccw(c-357.75,583.8) J5.3@-346.85,575.34 ; U2.31@-10.05,569.9 -24.56,584.41 -104.41,584.41 -210,690 -350,690 -380,660 -380,580 ; -380,580 J5.3@-370,570
M3V3: C12.1 C13.1 C17.1 C22.1 C25.1 J2.1 Q1.S R14.1 R18.1 R46.2 U1.16 U3.2 UB1.8 | length 5414.2
  Top Layer w7.87: 580.04,269.41 595.04,254.41 595.04,174.29 614.92,154.41 U1.16@614.92,138.15 ; 610.38,158.95 cw(c599.43,147.99) U1.16@614.92,147.99
  Top Layer w14: UB1.8@-577.6,-765.59 -455,-765.59 ; UB1.8@-553.12,-770.38 cw(c-541.55,-781.96) -541.55,-765.59 cw(c-541.55,-749.22) UB1.8@-553.12,-760.8 ; C17.1@-461.19,-719.19 cw(c-476.12,-734.12) -455,-734.12 cw(c-433.88,-734.12) C17.1@-448.81,-719.19 ; C17.1@-454.96,-718.59 -455,-718.63 -455,-765.59 ; R14.1@-422,-850 -379.96,-850 ; R18.1@-421.41,-915.59 v2(-379.96,-915.59) -379.96,-850 ; R18.1@-415.81,-921.19 cw(c-402.31,-934.69) -402.31,-915.59 ; R18.1@-415.81,-908.81 ccw(c-399.45,-892.45) -399.45,-915.59 ; R14.1@-415.81,-856.19 cw(c-400.88,-871.12) -400.88,-850 cw(c-400.88,-828.88) R14.1@-415.81,-843.81 ; v2@-383.54,-3.54 cw(c-392.17,-12.17) -379.96,-12.17 ; v2@-383.5,-919.13 ccw(c-392.03,-927.66) -392.03,-915.59 ccw(c-392.03,-903.52) -383.5,-912.05 ccw(c-392.03,-903.52) -379.96,-903.52 ccw(c-367.89,-903.52) v2@-376.43,-912.05 ; -380.55,-765.59 -455,-765.59 ; v2(-380,0) -379.96,-0.04 -379.96,-850
  Top Layer w20: C13.1@542.45,440.98 ccw(c524.14,459.29) 550.04,459.29 ; C12.1@543.97,315.44 ccw(c529.33,330.08) 550.04,330.08 ; R46.2@543.97,373.38 cw(c529.33,358.74) 550.04,358.74 ; R46.2@543.97,385.44 ccw(c529.33,400.08) 550.04,400.08 ; v2(550.04,414.41) 550.04,311.41 550,311.37 C12.1@548.04,309.41 548.04,301.41 550,299.45 580.04,269.41 ; C13.1@550.04,439.41 v2@550.04,484.41 ; C12.1@553.79,307.44 ccw(c582.23,307.44) 562.12,287.33
  Top Layer w30: Q1.S@72.4,-40 C22.1@160,-40 ; 160,-161.97 cw(c195.97,-161.97) C25.1@170.54,-136.54 ; 160,-88.03 ccw(c195.97,-88.03) C25.1@170.54,-113.46 ; 160,-77.74 cw(c202.78,-77.74) C22.1@172.53,-47.5 ; 160,-12.26 ccw(c202.78,-12.26) C22.1@172.53,-42.5 ; v2(160,74.37) v2(160,25) C22.1@160,-40 ; U3.2@162.6,-210 160,-207.4 C22.1@160,-40 ; C22.1@172,-45 167,-40 C22.1@160,-40 ; C12.1@550,311.37 v2(550,485)
  Bottom Layer w14: v2(-379.96,-915.59) 825.26,-915.59 920.04,-820.81 J2.1@920.04,-740.59 ; v2(-380,0) 135,0 v2(160,25) ; v2@-376.46,-3.54 cw(c-367.93,-12.07) -367.93,0 cw(c-367.93,12.07) v2@-376.46,3.54 ; v2@-376.43,-919.13 cw(c-367.89,-927.66) -367.89,-915.59 cw(c-367.89,-903.52) v2@-376.43,-912.05 ; v2@155,25 cw(c142.93,25) 151.46,16.46 cw(c160,7.93) v2@160,20 ; J2.1@911.07,-749.56 cw(c889.42,-771.21) 920.04,-771.21 cw(c950.66,-771.21) J2.1@929.01,-749.56
  Bottom Layer w30: v2@157,74.37 cw(c199.56,74.37) 169.47,104.47 ; v2@157.45,72.78 cw(c172.71,82.29) 160,95 ; v2(160,25) v2(160,74.37) 160,95 ; 541.46,386.46 ccw(c513.52,414.41) v2@553.04,414.41 ; v2(550,485) 550.04,484.96 v2(550.04,414.41) 550.04,395.04 ; v2@552.61,415.95 cw(c537.94,407.14) 550.04,395.04 ; 160,95 390,325 480,325 550.04,395.04
NetBZ1_1: BZ1.1 C43.2 R47.1 | length 541.2
  Top Layer w20: C43.2@-922,385 -869.32,385 ; BZ1.1@-887.31,98.66 ccw(c-930.72,142.08) -869.32,142.08 ccw(c-807.92,142.08) BZ1.1@-851.34,98.66 ; BZ1.1@-869.32,80.68 -869.32,385 ; -869.32,329.75 cw(c-799.72,329.75) R47.1@-848.94,378.97 ; -869.32,378.03 cw(c-848,378.03) R47.1@-863.08,393.11 ; R47.1@-853,385 -869.32,385
NetBZ1_2: BZ1.2 C43.1 T1.3 | length 832.2
  Top Layer w20: BZ1.2@-998.66,-12.69 ccw(c-1048.54,37.19) -978,37.19 ; BZ1.2@-980.68,-30.68 -978,-28 -978,97 C43.1@-978,385 -978,472 -945,505 T1.3@-945,660 ; -978,24.26 ccw(c-925.74,24.26) BZ1.2@-962.69,-12.69 ; T1.3@-950.66,654.34 cw(c-964.31,640.69) -945,640.69 cw(c-925.69,640.69) T1.3@-939.34,654.34
NetC2_1: C2.1 L1.1 | length 80.6
  Top Layer w12: L1.1@813.04,-65.59 C2.1@857.04,-65.59 ; L1.1@816.45,-69 cw(c824.69,-77.24) 824.69,-65.59 cw(c824.69,-53.94) L1.1@816.45,-62.18 ; C2.1@853.63,-69 ccw(c845.39,-77.24) 845.39,-65.59 ccw(c845.39,-53.94) C2.1@853.63,-62.18
NetC2_2: C2.2 C3.2 C5.2 | length 92.2
  Top Layer w10: C5.2@888.92,-115.49 ccw(c878.97,-105.54) 893.04,-105.54 ccw(c907.11,-105.54) C5.2@897.16,-115.49 ; C2.2@888.92,-70.69 cw(c878.97,-80.64) 893.04,-80.64 cw(c907.11,-80.64) C2.2@897.16,-70.69 ; C5.2@893.04,-120.59 C2.2@893.04,-72.59
NetC7_1: C7.1 U1.19 | length 132.7
  Top Layer w6: C7.1@498.04,59.41 520.04,59.41 543.66,83.03 U1.19@591.3,83.03 ; C7.1@503.53,53.48 cw(c517.85,39.17) 517.85,59.41 ; C7.1@503.53,64.55 ccw(c515.94,76.96) 515.94,59.41
NetC10_1: C10.1 U1.17 | length 181.7
  Top Layer w7: C10.1@462,110 462,112.72 489.28,140 535,140 560.47,114.53 U1.17@591.3,114.53 ; C10.1@462,118.31 ccw(c462,131.8) 471.54,122.26 ; C10.1@469.33,110.98 cw(c491.21,110.98) 475.74,126.46
NetC10_2: C10.2 U1.18 | length 125.7
  Top Layer w7: C10.2@498,110 540,110 551.22,98.78 U1.18@591.3,98.78 ; C10.2@503.18,104.82 cw(c515.69,92.31) 515.69,110 cw(c515.69,127.69) C10.2@503.18,115.18
NetC11_2: C11.2 U1.3 X1.3 | length 367.1
  Top Layer w6: U1.3@748.78,35.79 790.79,35.79 850.39,95.39 850.39,106.69 ; 855.14,111.44 ccw(c836.74,129.84) X1.3@862.76,129.84 ; X1.3@860.63,116.93 cw(c875.51,102.05) X1.3@875.51,123.09 ; X1.3@875.51,117.09 ccw(c875.51,81.57) 850.39,106.69 ; X1.3@875.51,131.81 850.39,106.69
  Top Layer w7.87: X1.3@867.16,142.13 ccw(c843.31,165.98) 877.04,165.98 ; C11.2@872.17,183.55 cw(c860.41,171.79) 877.04,171.79 cw(c893.67,171.79) C11.2@881.91,183.55 ; X1.3@875.51,131.81 877.04,133.34 C11.2@877.04,189.41 ; 877.04,158.61 ccw(c900.34,158.61) X1.3@883.86,142.13
NetC19_1: C19.1 UB1.1 Y1.1 | length 324.6
  Top Layer w10: Y1.1@-883.99,-756.01 ccw(c-905.7,-734.3) -875,-734.3 ccw(c-844.3,-734.3) -866.01,-756.01 ccw(c-844.3,-734.3) -844.3,-765 ccw(c-844.3,-795.7) Y1.1@-866.01,-773.99 ; C19.1@-879.57,-720.6 cw(c-890.6,-731.63) -875,-731.63 ; -875,-746.27 cw(c-838.7,-746.27) C19.1@-864.37,-720.6 ; C19.1@-875,-703 Y1.1@-875,-765 UB1.1@-782.91,-765 ; -824.63,-765 cw(c-824.63,-788.21) UB1.1@-808.22,-771.8 ; -821.78,-765 ccw(c-821.78,-745.82) UB1.1@-808.22,-759.38
NetC20_2: C20.2 UB1.2 Y1.2 | length 420.9
  Top Layer w10: C20.2@-940.63,-720.6 cw(c-966.3,-746.27) -930,-746.27 ; Y1.2@-939.11,-773.99 cw(c-960.82,-795.7) -930.12,-795.7 cw(c-899.42,-795.7) Y1.2@-921.13,-773.99 ; Y1.2@-939.11,-756.01 ccw(c-961.11,-734.01) -930,-734.01 ; -930,-734.59 ccw(c-899.71,-734.59) Y1.2@-921.13,-756.01 ; -930,-731.63 cw(c-914.4,-731.63) C20.2@-925.43,-720.6 ; C20.2@-930,-703 -930,-764.88 Y1.2@-930.12,-765 -930.12,-799.88 -915,-815 UB1.2@-782.91,-815 ; -824.63,-815 cw(c-824.63,-838.21) UB1.2@-808.22,-821.8 ; -821.78,-815 ccw(c-821.78,-795.82) UB1.2@-808.22,-809.38
NetC57_1: C57.1 R42.2 U2.1 | length 718.3
  Top Layer w6: R42.2@-142,800 R42.2@-140,798 ; v2@-75,516 cw(c-75,494.27) -59.64,509.64 cw(c-44.27,525) v2@-66,525 ; v2(-75,525) -55,505 -31.81,505 U2.1@-23.97,512.83 ; -39.65,505 ccw(c-39.65,517.38) U2.1@-30.9,508.63 ; C57.1@-7.37,750 C57.1@-4.96,752.41
  Top Layer w8: R42.2@-146.83,794.19 cw(c-163.31,777.71) -140,777.71 ; v2@-145.66,755.66 ccw(c-159.31,769.31) -140,769.31 ccw(c-120.69,769.31) -134.34,755.66 ccw(c-120.69,769.31) -120.69,750 ccw(c-120.69,730.69) v2@-134.34,744.34 ; -140,787.36 cw(c-130.35,787.36) R42.2@-137.17,794.19 ; R42.2@-140,798 v2(-140,750) C57.1@-7.37,750 ; -28.24,750 ccw(c-28.24,774.71) C57.1@-10.77,757.24 ; C57.1@-16.61,750 cw(c-16.61,741.75) C57.1@-10.77,747.58
  Bottom Layer w8: v2@-145.66,744.34 cw(c-159.31,730.69) -140,730.69 cw(c-120.69,730.69) v2@-134.34,744.34 ; v2(-140,750) -140,670 -75,605 v2(-75,525) ; v2@-80.66,530.66 ccw(c-94.31,544.31) -75,544.31 ccw(c-55.69,544.31) v2@-69.34,530.66
NetC62_1: C62.1 R45.2 U2.16 | length 275.4
  Top Layer w8: U2.16@214.05,512.83 310.04,416.85 R45.2@310.04,352.41 ; 290.91,435.97 ccw(c312.04,457.1) C62.1@312.04,427.22 ; R45.2@305.21,357.24 ccw(c293.56,368.89) 310.04,368.89 ccw(c326.52,368.89) R45.2@314.87,357.24 ; C62.1@307.21,413.6 cw(c300.39,406.77) 310.04,406.77 ; 310.04,397.12 cw(c333.35,397.12) C62.1@316.87,413.6
NetL1_2: L1.2 U1.32 | length 72.7
  Top Layer w12: L1.2@773.48,-65.59 L1.2@777.04,-65.59
  Top Layer w16: 729.48,-19.33 ccw(c773.48,-19.33) L1.2@773.48,-63.33
NetL2_2: L2.2 U1.15 | length 118.2
  Top Layer w7.87: L2.2@615.26,203.55 cw(c600.26,186.41) 623.04,186.41 ; L2.2@623.04,214.41 623.04,186.41 ; U1.15@630.67,138.15 630.67,178.78 623.04,186.41 ; L2.2@630.82,203.55 ccw(c645.82,186.41) 623.04,186.41
NetLED1_1: LED1.1 R2.1 | length 139.1
  Bottom Layer w14: LED1.1@-588,-717 R2.1@-520,-717 ; LED1.1@-583.48,-721.17 cw(c-573.42,-731.22) -573.42,-717 ; LED1.1@-583.48,-707.02 ccw(c-559.39,-682.94) -559.39,-717 ; R2.1@-528.15,-723.19 ccw(c-543.09,-738.12) -543.09,-717 ccw(c-543.09,-695.88) R2.1@-528.15,-710.81